# Altium PCB top_level.PcbDoc
Units mil, origin at the board's own origin, x right, y up, seen from the top; angles counter-clockwise.
Board outline 3920 x 1500 mil, 2 copper layers (Top Layer, Bottom Layer); 13 components, 8 nets, 134 pads, 0 vias.
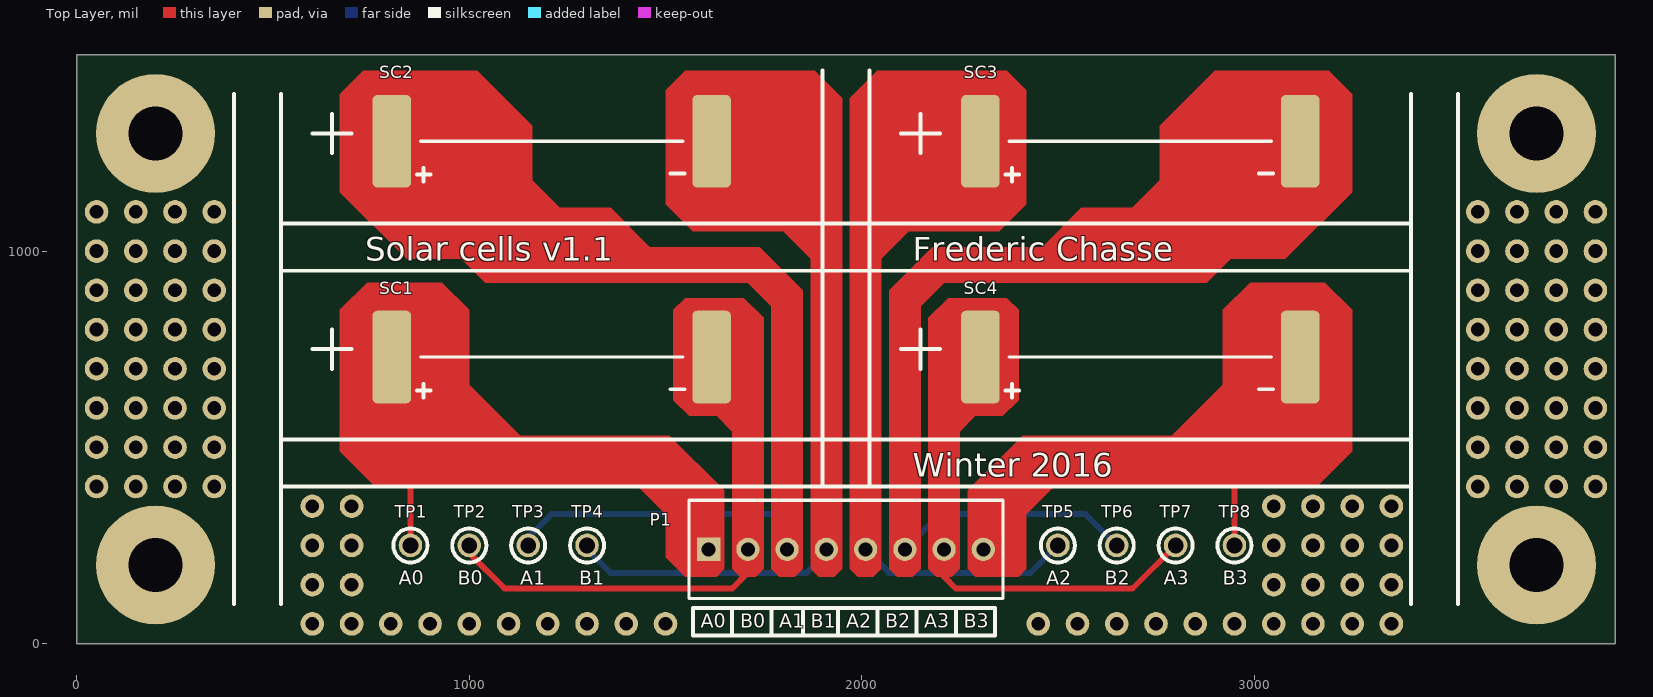
[diagram p0: Top Layer view]
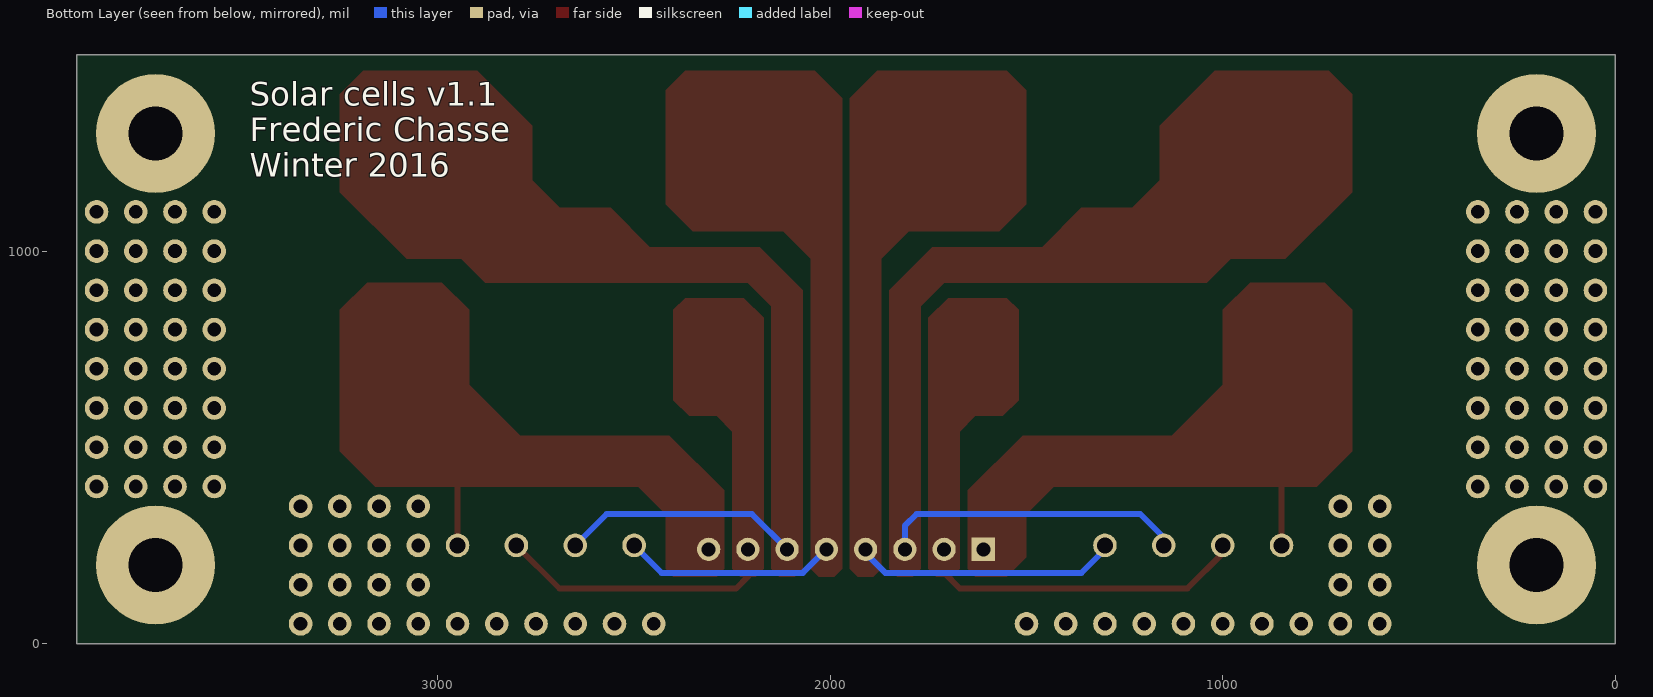
[diagram p1: Bottom Layer view, seen from below]
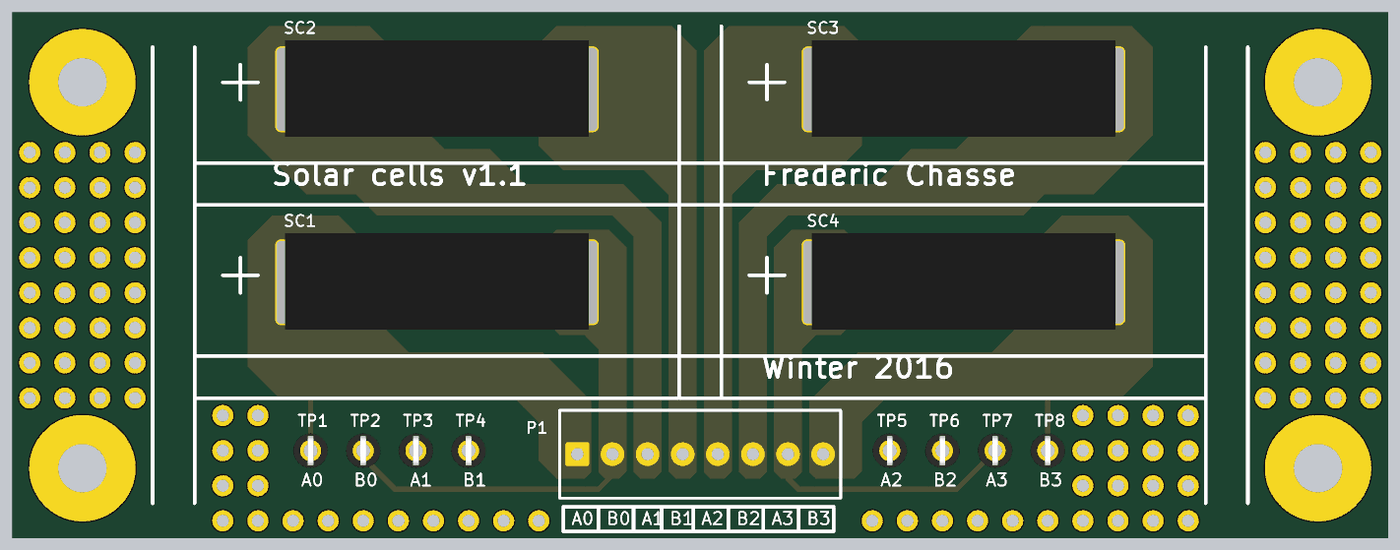
[diagram p2: 3D render of the assembled board from above, using the file's embedded part models]

## Layer stack, top to bottom
Top Solder: solder mask 0.4, Solder Resist, Dk 3.5
Top Layer: signal copper 1.4
Dielectric 1: dielectric 12.6, FR-4, Dk 4.8
Bottom Layer: signal copper 1.4
Bottom Solder: solder mask 0.4, Solder Resist, Dk 3.5

## Board outline
0,0 3920,0 3920,1500 0,1500

## Design rules (kind name [scope] priority, off if disabled: settings)
Clearance "Clearance IC pads" [(HasFootprint('IC-HTSSOP-14') OR HasFootprint('IC-TQFP-64')) vs (HasFootprint('IC-HTSSOP-14') OR HasFootprint('IC-TQFP-64'))] p1: gap=0
Clearance [All] p2: gap=8
HoleSize [All] p1: absolutevalues=TRUE maxlimit=200 minlimit=5 maxpercent=80.000 minpercent=20.000
MinimumSolderMaskSliver [All] p1: minsoldermaskwidth=0
PlaneConnect PlaneConnect_Vias [IsVia] p1: planeconnectstyle=Direct reliefexpansion=20 reliefentries=4 reliefconductorwidth=10 reliefairgap=10
PlaneConnect [All] p2: planeconnectstyle=Relief reliefexpansion=20 reliefentries=4 reliefconductorwidth=40 reliefairgap=10
PolygonConnect PolygonConnect_Vias [IsVia] p1: connectstyle=Direct reliefconductorwidth=10 reliefentries=4 polygonreliefangle="90 Angle" airgapwidth=10
PolygonConnect [All] p2: connectstyle=Relief reliefconductorwidth=40 reliefentries=4 polygonreliefangle="90 Angle" airgapwidth=10
RoutingVias [All] p1: holewidth=14 width=28 viastyle="Through Hole" minholewidth=14 minwidth=28 maxholewidth=28 maxwidth=50
SilkToSilkClearance [All] p1: silktosilkclearance=5
SilkToSolderMaskClearance [IsPad vs IsDesignator OR IsText] p1: minsilkscreentomaskgap=6 clearancetoexposedcopper=TRUE
SolderMaskExpansion [All] p1: expansion=4
Width [All] p1: maxlimit=20 minlimit=10 preferedwidth=15 minimp=50.000000 maximp=50.000000 favimp=50.000000
25 further rules are at their usual default settings.

## Components (designator, comment, footprint, x,y, rotation, side; value= is the part's Value field where it differs from the comment)
P1 "CON - HEADER 1X8" CON-HEADER-1X8 1610,240 r0 top
SC1 "RS - RESISTOR VARIABLE" "SC - KXOB22-04X3L" 1210,730 r180 top
SC2 "RS - RESISTOR VARIABLE" "SC - KXOB22-04X3L" 1210,1280 r180 top
SC3 "RS - RESISTOR VARIABLE" "SC - KXOB22-04X3L" 2710,1280 r180 top
SC4 "RS - RESISTOR VARIABLE" "SC - KXOB22-04X3L" 2710,730 r180 top
TP1 "5003K" "TP - VERTICAL" 850,250 r0 top
TP2 "5003K" "TP - VERTICAL" 1000,250 r0 top
TP3 "5003K" "TP - VERTICAL" 1150,250 r0 top
TP4 "5003K" "TP - VERTICAL" 1300,250 r0 top
TP5 "5003K" "TP - VERTICAL" 2500,250 r0 top
TP6 "5003K" "TP - VERTICAL" 2650,250 r0 top
TP7 "5003K" "TP - VERTICAL" 2800,250 r0 top
TP8 "5003K" "TP - VERTICAL" 2950,250 r0 top

## Footprints (in the part's own frame and the unit in brackets; to place one, negate y for a bottom-side part, rotate by r counter-clockwise, add the part's x,y. Pads: shape width x height; smd on the part's side, far side on the other; paste and mask are expansions set on the pad)
CON-HEADER-1X8 [mm]
  rect 1.5x1.5 hole 0.9: 1(0,0)
  round 1.5 hole 0.9: 2(2.54,0) 3(5.08,0) 4(7.62,0) 5(10.16,0) 6(12.7,0) 7(15.24,0) 8(17.78,0)
  silkscreen extent -1.27,-3.17 19.05,3.17
"SC - KXOB22-04X3L" [mm]
  round 1 on Mech15: 0(0,0)
  rrect25% 2.5x6 smd: 1(-10.35,0) 2(10.35,0)
  silkscreen extent -8.59,0 8.74,2.62, body extent -11,-3.56 11,3.44, height 2
"TP - VERTICAL" [mil] "Testpoint"
  round 60 hole 40: 1(0,0)
  silkscreen extent -43,-43 43,43, body extent -50,-50 50,50, height 192

## Part data
P1: "100mil header 1 row 6 pins"
TP1 TP2 TP3 TP4 TP5 TP6 TP7 TP8: library part "TP - Test point vertical"

## Free pads (board coordinates)
  round 303 hole 137.8: 0(200,200) 0(200,1300) 0(3720,200) 0(3720,1300)
  round 60 hole 35: 2(50,400) 2(50,500) 2(50,600) 2(50,700) 2(50,800) 2(50,900) 2(50,1000) 2(50,1100) 2(150,400) 2(150,500) 2(150,600) 2(150,700) 2(150,800) 2(150,900) 2(150,1000) 2(150,1100) 2(250,400) 2(250,500) 2(250,600) 2(250,700) 2(250,800) 2(250,900) 2(250,1000) 2(250,1100) 2(350,400) 2(350,500) 2(350,600) 2(350,700) 2(350,800) 2(350,900) 2(350,1000) 2(350,1100) 2(600,50) 2(600,150) 2(600,250) 2(600,350) 2(700,50) 2(700,150) 2(700,250) 2(700,350) 2(800,50) 2(900,50) 2(1000,50) 2(1100,50) 2(1200,50) 2(1300,50) 2(1400,50) 2(1500,50) 2(2450,50) 2(2550,50) 2(2650,50) 2(2750,50) 2(2850,50) 2(2950,50) 2(3050,50) 2(3050,150) 2(3050,250) 2(3050,350) 2(3150,50) 2(3150,150) 2(3150,250) 2(3150,350) 2(3250,50) 2(3250,150) 2(3250,250) 2(3250,350) 2(3350,50) 2(3350,150) 2(3350,250) 2(3350,350) 2(3570,400) 2(3570,500) 2(3570,600) 2(3570,700) 2(3570,800) 2(3570,900) 2(3570,1000) 2(3570,1100) 2(3670,400) 2(3670,500) 2(3670,600) 2(3670,700) 2(3670,800) 2(3670,900) 2(3670,1000) 2(3670,1100) 2(3770,400) 2(3770,500) 2(3770,600) 2(3770,700) 2(3770,800) 2(3770,900) 2(3770,1000) 2(3770,1100) 2(3870,400) 2(3870,500) 2(3870,600) 2(3870,700) 2(3870,800) 2(3870,900) 2(3870,1000) 2(3870,1100)

## Nets (pads, with @x,y where several pads share a name; then routed paths per layer and width w, separated by ;. In a path a pad name is that pad's centre, name@x,y a point inside that pad or via, vN(x,y) a via of type N, cw(c..) or ccw(c..) an arc to the next point about the centre after c; other vN are vias at no path point)
POTA1: P1.1 SC1.2 TP1.1 | length 190
  Top Layer w15: TP1.1 850,440
POTA2: P1.3 SC2.2 TP3.1 | length 777.3
  Bottom Layer w15: TP3.1 1150,270 1210,330 1780,330 1810,300 P1.3
POTA3: P1.5 SC3.2 TP5.1 | length 543.8
  Bottom Layer w15: P1.5 2070,180 2430,180 TP5.1
POTA4: P1.7 SC4.2 TP7.1 | length 718
  Top Layer w15: P1.7 2210,170 2240,140 2690,140 TP7.1
POTB1: P1.2 SC1.1 TP2.1 | length 843.8
  Top Layer w15: TP2.1 1000,230 1090,140 1670,140 1710,180 P1.2
POTB2: P1.4 SC2.1 TP4.1 | length 675.6
  Bottom Layer w15: TP4.1 1300,240 1360,180 1860,180 1910,230 P1.4
POTB3: P1.6 SC3.1 TP6.1 | length 610.4
  Bottom Layer w15: P1.6 2200,330 2570,330 TP6.1
POTB4: P1.8 SC4.1 TP8.1 | length 200
  Top Layer w15: TP8.1 2950,450
pads on no net: SC1.0 SC2.0 SC3.0 SC4.0

## Other copper
Top Layer:
  region net POTB3: 2150,190 2150,860 2210,920 2880,920 2940,980 3080,980 3250,1150 3250,1400 3190,1460 2900,1460 2760,1320 2760,1180 2690,1110 2560,1110 2460,1010 2180,1010 2070,900 2070,190 2090,170 2130,170
  region net POTB4: 2270,190 2270,390 2410,530 2790,530 2920,660 2920,850 2990,920 3180,920 3250,850 3250,490 3160,400 2490,400 2420,330 2420,190 2400,170 2290,170
  region net POTA1: 1650,190 1650,390 1510,530 1130,530 1000,660 1000,850 930,920 740,920 670,850 670,490 760,400 1430,400 1500,330 1500,220 1550,170 1630,170
  region net POTA4: 2250,540 2290,580 2360,580 2400,620 2400,850 2370,880 2220,880 2170,830 2170,190 2190,170 2230,170 2250,190
  region net POTA3: 2050,190 2050,980 2120,1050 2350,1050 2420,1120 2420,1410 2370,1460 2040,1460 1970,1390 1970,190 1990,170 2030,170
  region net POTB2: 1870,190 1870,980 1800,1050 1570,1050 1500,1120 1500,1410 1550,1460 1880,1460 1950,1390 1950,190 1930,170 1890,170
  region net POTA2: 1770,190 1770,860 1710,920 1040,920 980,980 840,980 670,1150 670,1400 730,1460 1020,1460 1160,1320 1160,1180 1230,1110 1360,1110 1460,1010 1740,1010 1850,900 1850,190 1830,170 1790,170
  region net POTB1: 1670,540 1630,580 1560,580 1520,620 1520,850 1550,880 1700,880 1750,830 1750,190 1730,170 1690,170 1670,190

## Silkscreen, mask and mechanical layers (free items; w line width, h text height)
Top Overlay:
  lines w10: 400,100 400,1400 ; 520,100 520,1400 ; 520,400 3400,400 ; 520,520 3400,520 ; 520,950 3400,950 ; 520,1070 3400,1070 ; 600,750 700,750 ; 600,1300 700,1300 ; 650,700 650,800 ; 650,1250 650,1350 ; 1670,20 1670,90 ; 1770,20 1770,90 ; 1850,20 1850,90 ; 1900,400 1900,1460 ; 1940,20 1940,90 ; 2020,400 2020,1460 ; 2040,20 2040,90 ; 2100,750 2200,750 ; 2100,1300 2200,1300 ; 2140,20 2140,90 ; 2150,700 2150,800 ; 2150,1250 2150,1350 ; 2240,20 2240,90 ; 3400,100 3400,1400 ; 3520,100 3520,1400 ; 1570,20 1570,90 2340,90 2340,20 1570,20
  text "Solar cells v1.1" at 735,975 h60
  text "Frederic Chasse" at 2130,975 h60
  text "Winter 2016" at 2130,425 h60
  text "A0" at 820,150 h35
  text "B0" at 970,150 h35
  text "A1" at 1130,150 h35
  text "B1" at 1280,150 h35
  text "A2" at 2470,150 h35
  text "B2" at 2620,150 h35
  text "A3" at 2770,150 h35
  text "B3" at 2920,150 h35
  text "A0" at 1590,40 h35
  text "B0" at 1690,40 h35
  text "A1" at 1790,40 h35
  text "B1" at 1870,40 h35
  text "A2" at 1960,40 h35
  text "B2" at 2060,40 h35
  text "A3" at 2160,40 h35
  text "B3" at 2260,40 h35
Bottom Overlay:
  text "Solar cells v1.1 / Frederic Chasse / Winter 2016" at 3480,1190 h60
Mechanical 1:
  drawing of 303 lines, arcs and shapes, not listed
  text "Layer" at -232.5,4764.29 h60
  text "Name" at 177.41,4764.29 h60
  text "Material" at 1107.16,4764.29 h60
  text "Thickness" at 1966.92,4764.29 h60
  text "Constant" at 2616.76,4764.29 h60
  text "Board Layer Stack" at 3186.62,4764.29 h60
  text "1" at -232.5,4644.29 h60
  text "Top Overlay" at 177.41,4644.29 h60
  text "2" at -232.5,4524.29 h60
  text "Top Solder" at 177.41,4524.29 h60
  text "Solder Resist" at 1107.16,4524.29 h60
  text "0.40mil" at 1966.92,4524.29 h60
  text "3.5" at 2616.76,4524.29 h60
  text "3" at -232.5,4404.29 h60
  text "Top Layer" at 177.41,4404.29 h60
  text "Copper" at 1107.16,4404.29 h60
  text "1.40mil" at 1966.92,4404.29 h60
  text "4" at -232.5,4284.29 h60
  text "Dielectric 1" at 177.41,4284.29 h60
  text "FR-4" at 1107.16,4284.29 h60
  text "12.60mil" at 1966.92,4284.29 h60
  text "4.8" at 2616.76,4284.29 h60
  text "5" at -232.5,4164.29 h60
  text "Bottom Layer" at 177.41,4164.29 h60
  text "Copper" at 1107.16,4164.29 h60
  text "1.40mil" at 1966.92,4164.29 h60
  text "6" at -232.5,4044.29 h60
  text "Bottom Solder" at 177.41,4044.29 h60
  text "Solder Resist" at 1107.16,4044.29 h60
  text "0.40mil" at 1966.92,4044.29 h60
  text "3.5" at 2616.76,4044.29 h60
  text "7" at -232.5,3924.29 h60
  text "Bottom Overlay" at 177.41,3924.29 h60
Drill Drawing:
  circle w10: c4231.87,923.33 r33.33
  lines w6: 0,0 0,1500 3920,1500 3920,0 0,0
  lines w10: 4198.53,456.67 4215.2,456.67 4231.87,440 4248.53,456.67 4265.2,456.67 4248.53,473.33 4265.2,490 4248.53,490 4231.87,506.67 4215.2,490 4198.53,490 4215.2,473.33 4198.53,456.67 ; 4198.53,656.67 4265.2,656.67 4231.87,590 4198.53,656.67 ; 4198.53,740 4265.2,740 4265.2,806.67 4198.53,806.67 4198.53,740
  lines w15: 4138.74,395 14719.81,395 ; 4138.74,995 14719.81,995 ; 4689.62,245 4689.62,1145 ; 5279.46,245 5279.46,1145 ; 6429.12,245 6429.12,1145 ; 6935,245 6935,1145 ; 7668.8,245 7668.8,1145 ; 9168.35,245 9168.35,1145 ; 9758.2,245 9758.2,1145 ; 10504,245 10504,1145 ; 11153.83,245 11153.83,1145 ; 12007.59,245 12007.59,1145 ; 13341.2,245 13341.2,1145 ; 4138.74,245 14719.81,245 14719.81,1145 4138.74,1145 4138.74,245
  text "Symbol" at 4228.74,1040 h72
  text "Count" at 4734.62,1040 h72
  text "Hole Size" at 5324.46,1040 h72
  text "Plated" at 6474.12,1040 h72
  text "Hole Type" at 6980,1040 h72
  text "Drill Layer Pair" at 7713.8,1040 h72
  text "Via/Pad" at 9213.35,1040 h72
  text "Pad Shape" at 9803.2,1040 h72
  text "Template" at 10549,1040 h72
  text "Description" at 11198.83,1040 h72
  text "Hole Tolerance (+)" at 12052.59,1040 h72
  text "Hole Tolerance (-)" at 13386.2,1040 h72
  text "4" at 4734.62,890 h60
  text "137.80mil (3.500mm)" at 5324.46,890 h60
  text "PTH" at 6474.12,890 h60
  text "Round" at 6980,890 h60
  text "Top Layer - Bottom Layer" at 7713.8,890 h60
  text "Pad" at 9213.35,890 h60
  text "Rounded" at 9803.2,890 h60
  text "c770h350" at 10549,890 h60
  text "8" at 4734.62,740 h60
  text "35.43mil (0.900mm)" at 5324.46,740 h60
  text "PTH" at 6474.12,740 h60
  text "Round" at 6980,740 h60
  text "Top Layer - Bottom Layer" at 7713.8,740 h60
  text "Pad" at 9213.35,740 h60
  text "(Mixed)" at 9803.2,740 h60
  text "(Mixed)" at 10549,740 h60
  text "8" at 4734.62,590 h60
  text "40.00mil (1.016mm)" at 5324.46,590 h60
  text "PTH" at 6474.12,590 h60
  text "Round" at 6980,590 h60
  text "Top Layer - Bottom Layer" at 7713.8,590 h60
  text "Pad" at 9213.35,590 h60
  text "Rounded" at 9803.2,590 h60
  text "c152h102" at 10549,590 h60
  text "102" at 4734.62,440 h60
  text "35.00mil (0.889mm)" at 5324.46,440 h60
  text "PTH" at 6474.12,440 h60
  text "Round" at 6980,440 h60
  text "Top Layer - Bottom Layer" at 7713.8,440 h60
  text "Pad" at 9213.35,440 h60
  text "Rounded" at 9803.2,440 h60
  text "c152h89" at 10549,440 h60
  text "122 Total" at 4734.62,290 h60

## Dimensions
200,1300 to 0,1500 on Mechanical 1
200,1300 to 0,1500 on Mechanical 1
0,0 to 3920,0 on Mechanical 1
0,0 to 0,1500 on Mechanical 1